# Altium PCB PCB_DIIN.PcbDoc
Units mil, origin at the board's own origin, x right, y up, seen from the top; angles counter-clockwise.
Board outline 6000 x 4000 mil, 2 copper layers (Top Layer, Bottom Layer); 15 components, 22 nets, 46 pads, 0 vias.
Unrouted connection lines stored in the file: 11.
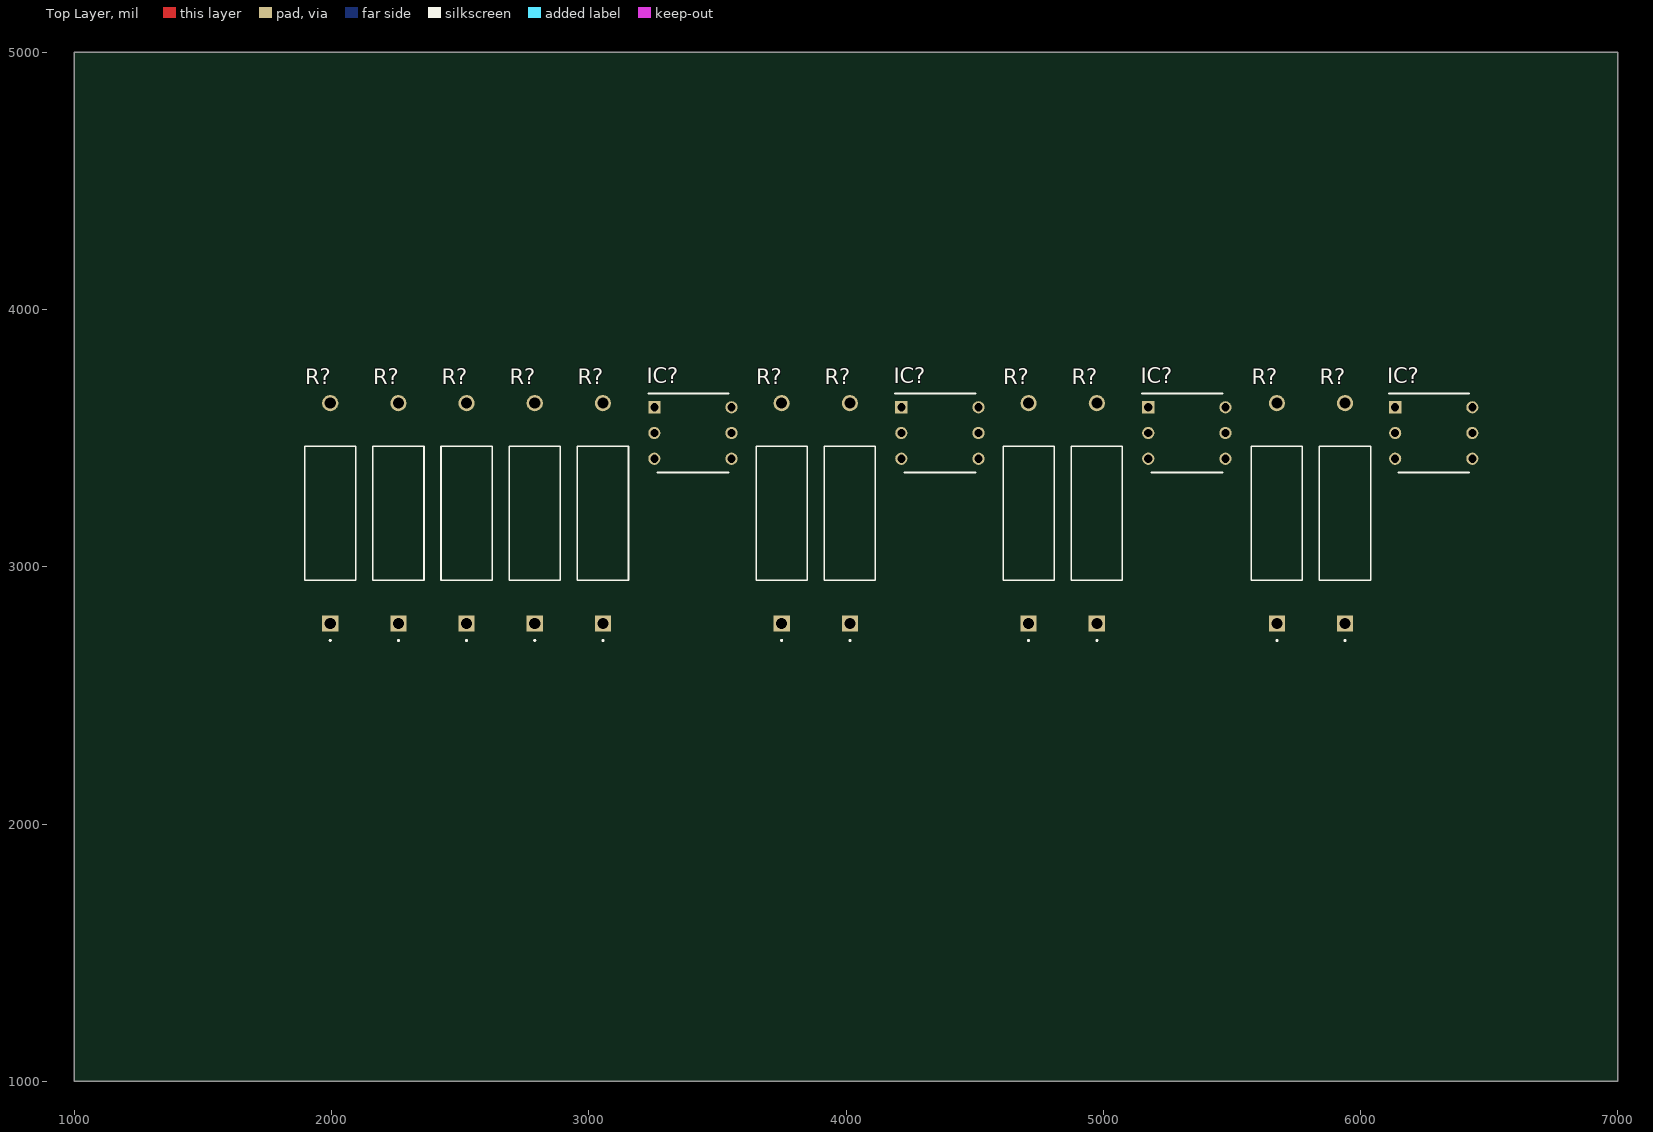
[diagram p0: Top Layer view]
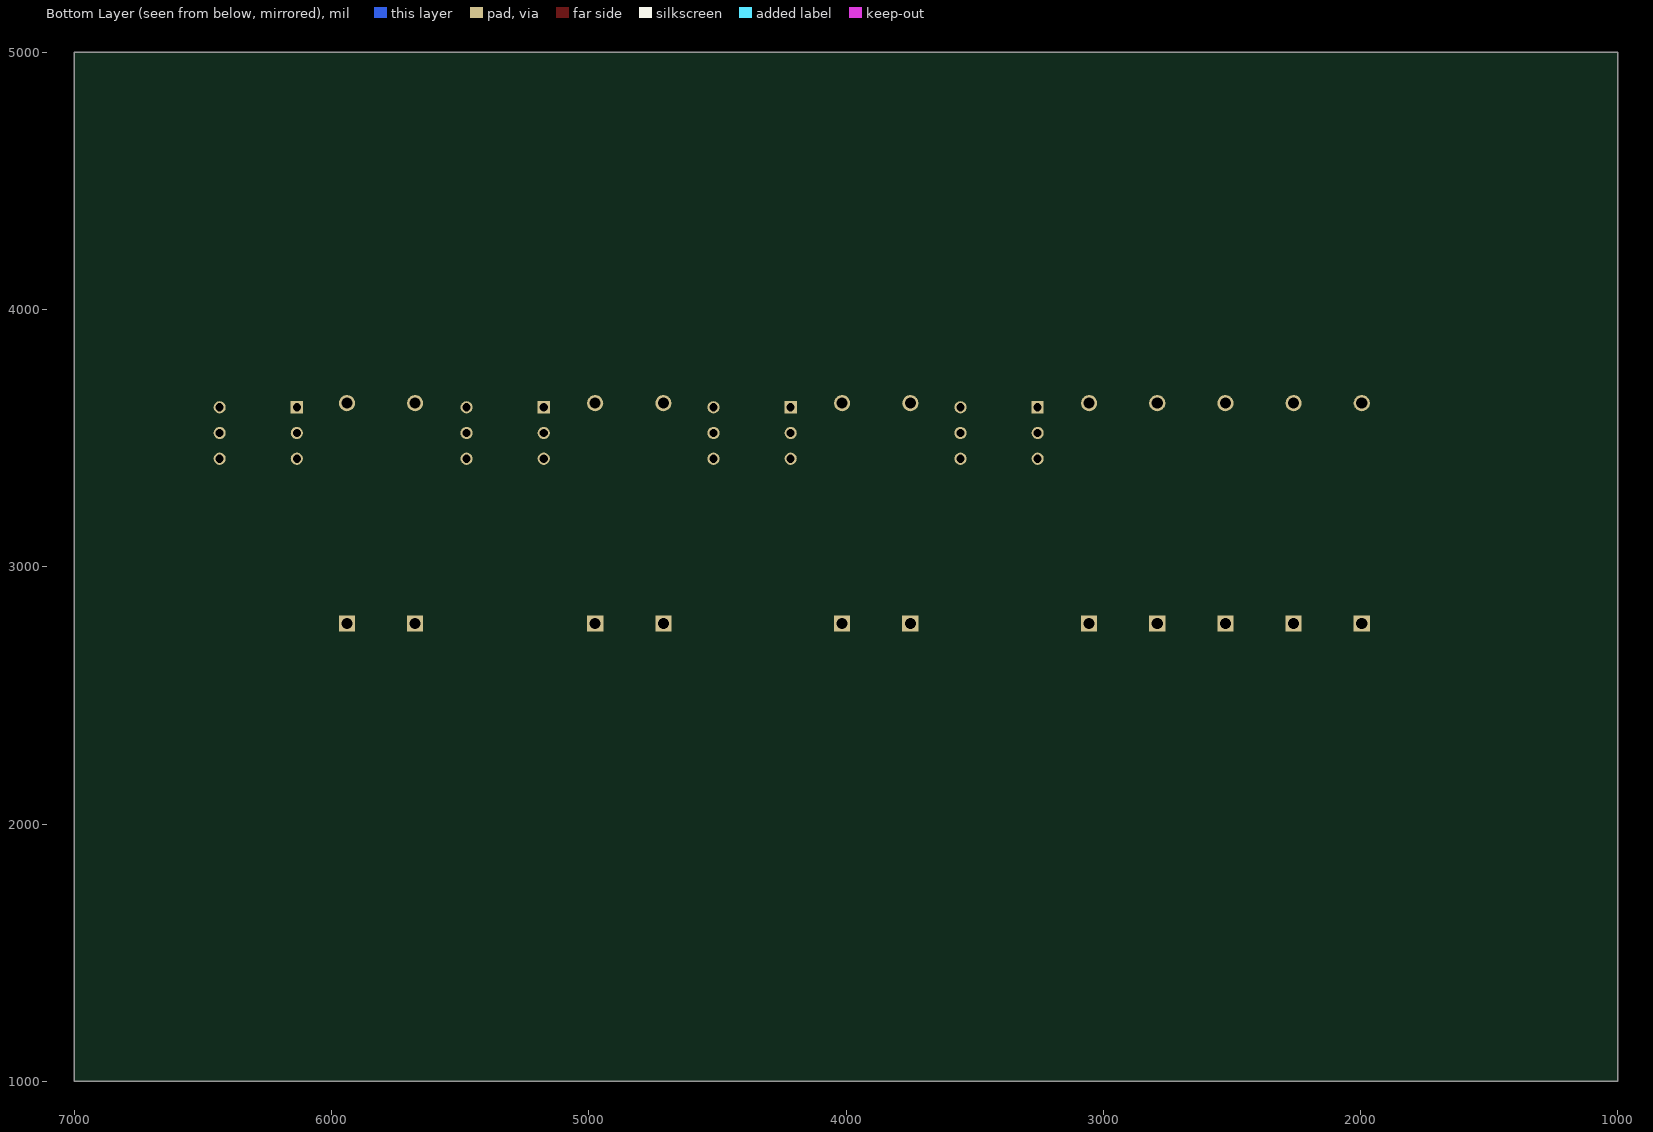
[diagram p1: Bottom Layer view, seen from below]

## Layer stack, top to bottom
Top Solder: solder mask 0.4, Solder Resist, Dk 3.5
Top Layer: signal copper 1.4
Dielectric 1: dielectric 12.6, FR-4, Dk 4.8
Bottom Layer: signal copper 1.4
Bottom Solder: solder mask 0.4, Solder Resist, Dk 3.5

## Board outline
1000,1000 7000,1000 7000,5000 1000,5000

## Design rules (kind name [scope] priority, off if disabled: settings)
Clearance [All] p1: gap=10 ignorepadtopadclearanceinfootprint=FALSE except(0: Arc-Hole Track-Hole SMDPad-Hole THPad-Hole Via-Hole Fill-Hole Poly-Hole Region-Hole Text-Hole)
PolygonConnect [All] p1: connectstyle=Relief reliefconductorwidth=10 reliefentries=4 polygonreliefangle="90 Angle" airgapwidth=10
RoutingVias [All] p1: holewidth=28 width=50 viastyle="Through Hole" minholewidth=28 minwidth=50 maxholewidth=28 maxwidth=50
SolderMaskExpansion [All] p1: expansion=4 istentingtop=FALSE
Width [All] p1: maxlimit=10 minlimit=10 preferedwidth=10
30 further rules are at their usual default settings.

## Classes and differential pairs
component class Esq_PCB_DIIN: IC? P? R?

## Components (designator, comment, footprint, x,y, rotation, side; value= is the part's Value field where it differs from the comment)
IC? "MOC3021" DIP762W60P254L730H450Q6N 3405,3520 r0 top
IC? "MOC3021" DIP762W60P254L730H450Q6N 5325,3520 r0 top
IC? "MOC3021" DIP762W60P254L730H450Q6N 6285,3520 r0 top
IC? "MOC3021" DIP762W60P254L730H450Q6N 4365,3520 r0 top
R? "1k" RES_AC03_VIS 2790,2780 r90 top
R? "1k" RES_AC03_VIS 3750,2780 r90 top
R? "1k" RES_AC03_VIS 5940,2780 r90 top
R? "1k" RES_AC03_VIS 4975,2780 r90 top
R? "1k" RES_AC03_VIS 3055,2780 r90 top
R? "1k" RES_AC03_VIS 1995,2780 r90 top
R? "1k" RES_AC03_VIS 5675,2780 r90 top
R? "1k" RES_AC03_VIS 2260,2780 r90 top
R? "1k" RES_AC03_VIS 4015,2780 r90 top
R? "1k" RES_AC03_VIS 4710,2780 r90 top
R? "1k" RES_AC03_VIS 2525,2780 r90 top

## Footprints (in the part's own frame and the unit in brackets; to place one, negate y for a bottom-side part, rotate by r counter-clockwise, add the part's x,y. Pads: shape width x height; smd on the part's side, far side on the other; paste and mask are expansions set on the pad)
DIP762W60P254L730H450Q6N [mm]
  rect 1.2x1.2 hole 0.8: 1(-3.81,2.54)
  round 1.2 hole 0.8: 2(-3.81,0) 3(-3.81,-2.54) 4(3.81,-2.54) 5(3.81,0) 6(3.81,2.54)
  silkscreen extent -4.41,-3.9 3.5,3.9, body extent -3.96,-3.65 3.96,3.65, height 4.5
RES_AC03_VIS [mil]
  rect 63x63 / inner round 60 / far side rect 63x63 hole 43 paste-31.5 mask+0: 1(0,0)
  round 63 / inner round 60 / far side round 63 hole 43 paste-31.5 mask+0: 2(856,0)
  silkscreen extent -69,-99 689,100, body extent -16,-95 873,95, height 189

## Part data
IC? IC? IC? IC?: "Integrated Circuit", Manufacturer_Name=Lite-On, Mouser Part Number=859-MOC3021, Arrow Part Number=MOC3021, Arrow Price/Stock=https://www.arrow.com/en/products/moc3021/lite-on-technology?region=nac, Datasheet Link=https://datasheet.datasheetarchive.com/originals/distributors/Datasheets-17/DSA-323139.pdf, Height=4.5mm, Manufacturer_Part_Number=MOC3021, Mouser Price/Stock=https://www.mouser.co.uk/ProductDetail/Lite-On/MOC3021?qs=%2F3Qg3%252BjSQfNbQyAt8MJ%2FPw%3D%3D
R? R? R? R? R? R? R? R? R? R? R?: library part CMP-00030-41941222-1, "AC03000001008JAC00 VISHAY AC03000001008JAC00 Through Hole Resistor, 1 ohm, Axial Leaded, 3 W, 5%, AC Series", Case/Package=Conformal, Max Operating Temperature=275°C, Max Power Dissipation=3W, Min Operating Temperature=0°C, Resistance=1Ω, Temperature Coefficient=-10ppm/°C, Tolerance=5%, Voltage Rating=2V, Composition="Metal Film, Wirewound", Contact Plating=Tin, Diameter=4.8mm, Features="Flame Retardant Coating", Lead Diameter=800µm, Lead Free="Lead Free", Length=13mm, Military Standard=Not, Mount="Through Hole", NexarPartId=41941222, Number of Pins=2, Number of Terminations=2, Packaging="Cut Tape (CT)", Power Rating=3W, Radiation Hardening=No, REACH SVHC=Unknown, RoHS=Compliant, Schedule B="8533210080, 8533210080", Termination=Axial, Voltage Rating (DC)=2V, Weight=749.986634mg, Width=4.8mm

## Nets (pads, with @x,y where several pads share a name; then routed paths per layer and width w, separated by ;. In a path a pad name is that pad's centre, name@x,y a point inside that pad or via, vN(x,y) a via of type N, cw(c..) or ccw(c..) an arc to the next point about the centre after c; other vN are vias at no path point)
+5: R?.2@5675,3636
+12: R?.2@3055,3636 R?.2@4015,3636 R?.2@4975,3636
Cloro: R?.1@2260,2780
Con_cloro: R?.1@3750,2780
Con_dureza: R?.1@2790,2780
Con_mz: R?.1@5940,2780
Con_ph: R?.1@4710,2780
Dureza: R?.1@2525,2780
GND: IC?.2@3255,3520 IC?.2@4215,3520 IC?.2@5175,3520 IC?.3@6135,3420 IC?.4
NetIC?_1: IC?.1@3255,3620 R?.2@2790,3636
NetIC?_6: IC?.6@3555,3620 R?.1@3055,2780
NetP?_1: R?.2@1995,3636
NetP?_2: R?.1@5675,2780
NOE: 
OUT: 
PH: R?.1@1995,2780
S1: 
S2: 
S3: 
SCL: 
SDA: 
SO: 
pads on no net: IC?.1@4215,3620 IC?.1@5175,3620 IC?.1@6135,3620 IC?.2@6135,3520 IC?.3@3255,3420 IC?.3@4215,3420 IC?.3@5175,3420 IC?.5 IC?.6@4515,3620 IC?.6@5475,3620 IC?.6@6435,3620 R?.1@4015,2780 R?.1@4975,2780 R?.2@2260,3636 R?.2@2525,3636 R?.2@3750,3636 R?.2@4710,3636 R?.2@5940,3636